# Altium PCB PCB1.PcbDoc
Units mm, origin at the board's own origin, x right, y up, seen from the top; angles counter-clockwise.
Board outline 134.5 x 50 mm, 2 copper layers (Top Layer, Bottom Layer), stack 0.98 mm thick; 15 components, 13 nets, 40 pads, 7 vias.
Unrouted connection lines stored in the file: 1.
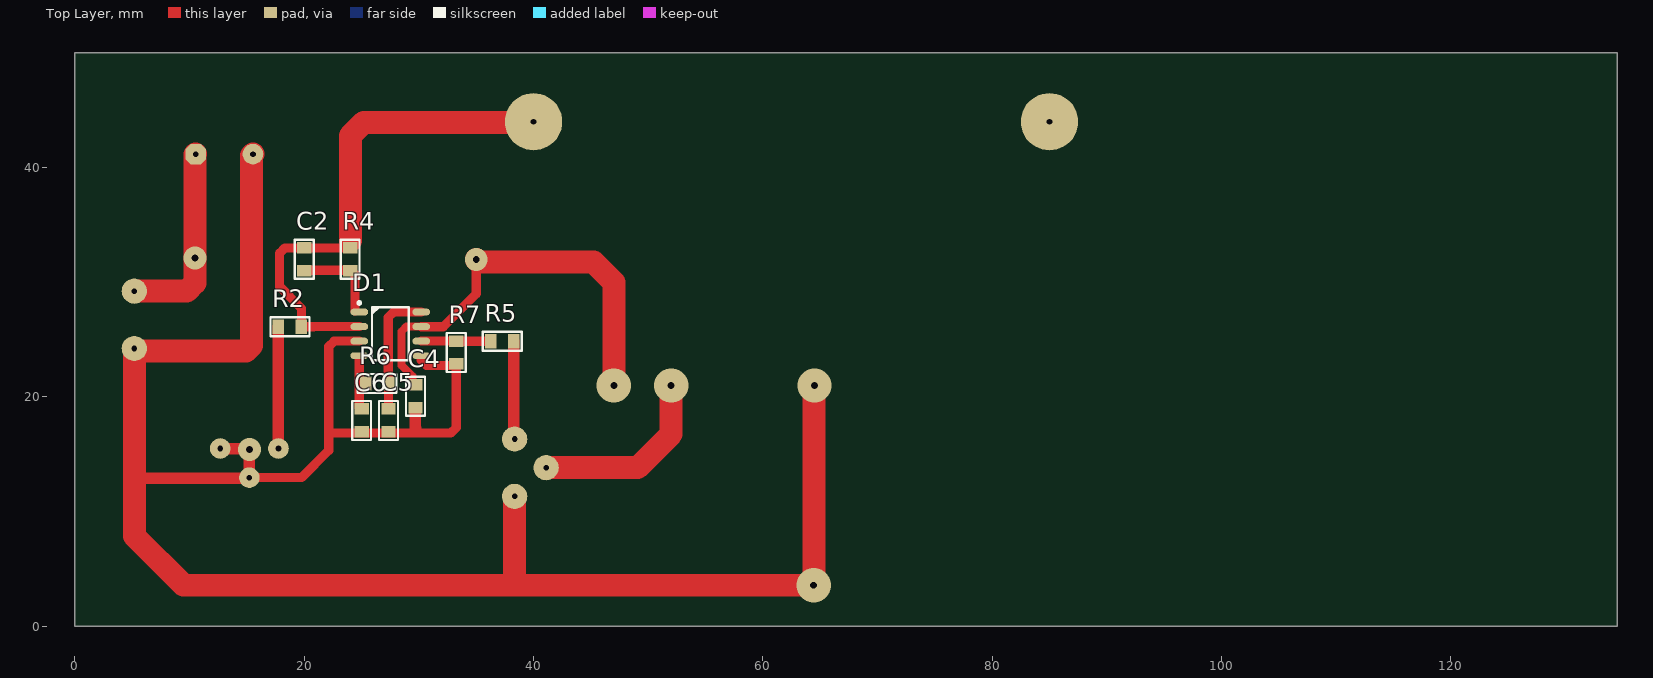
[diagram p0: Top Layer view]
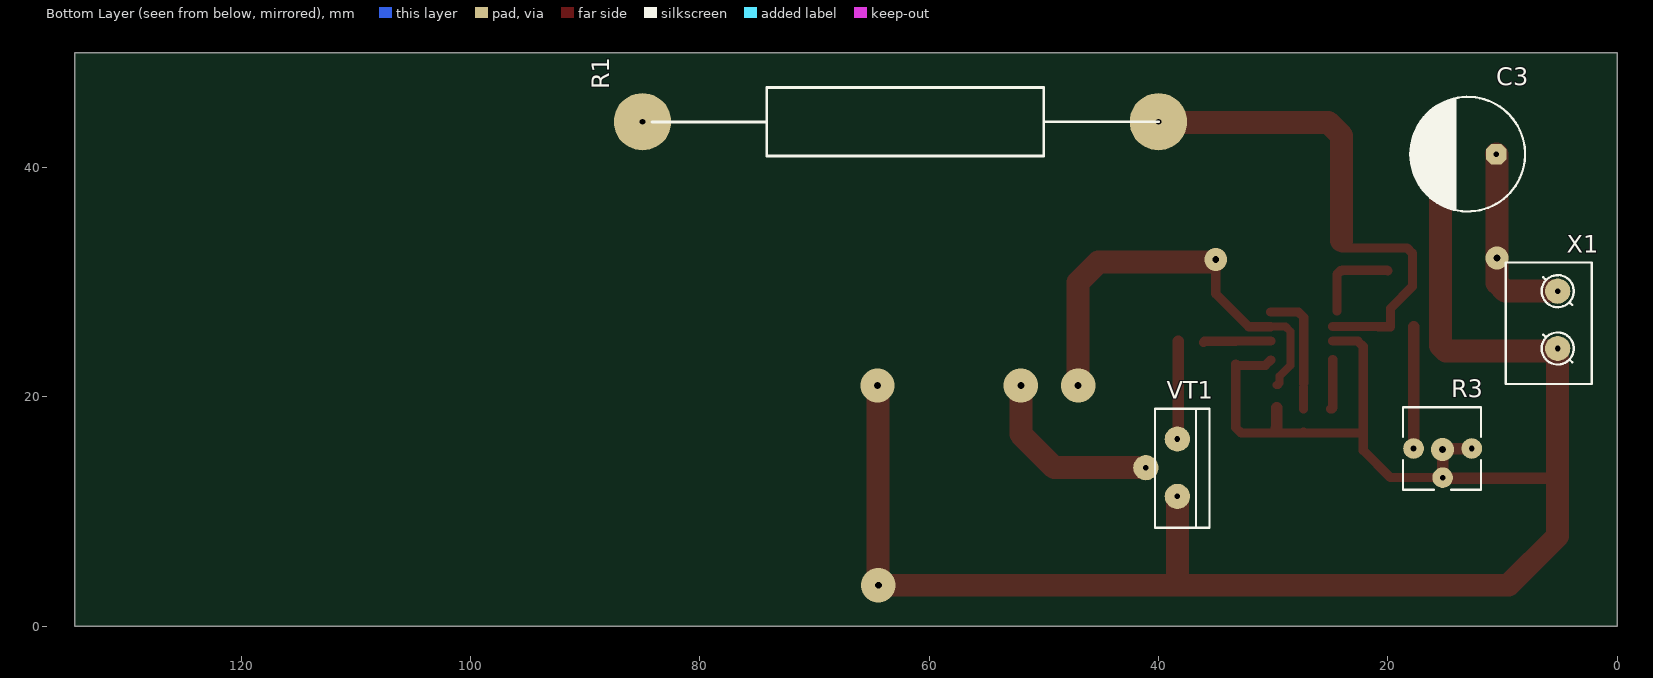
[diagram p1: Bottom Layer view, seen from below]
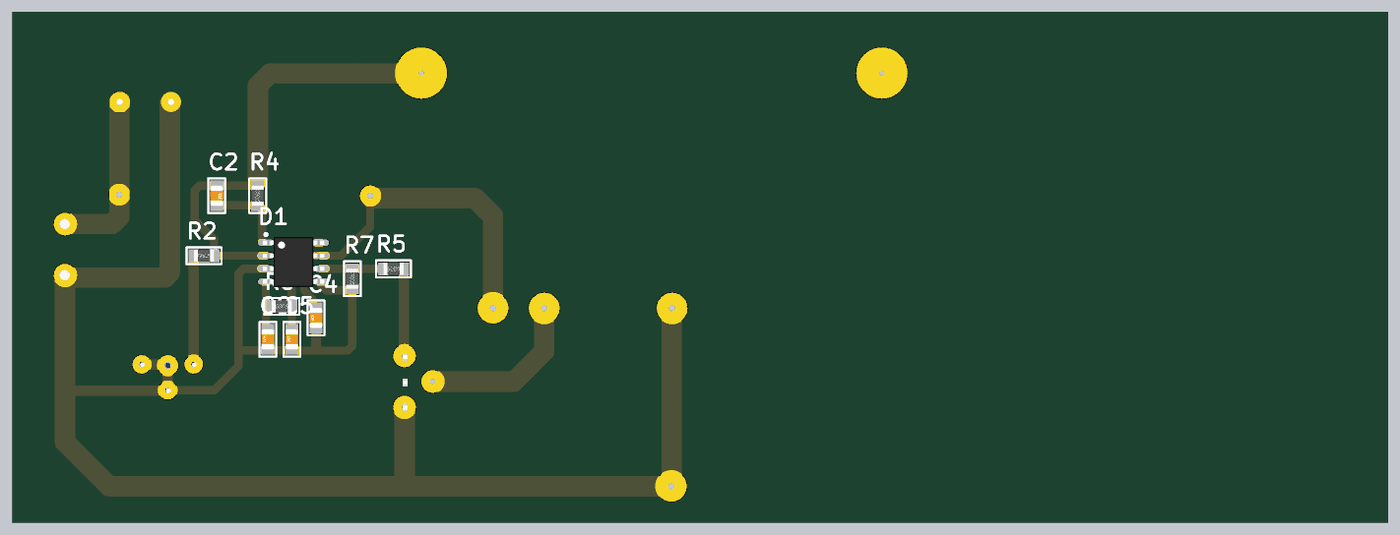
[diagram p2: 3D render of the assembled board from above, using the file's embedded part models]
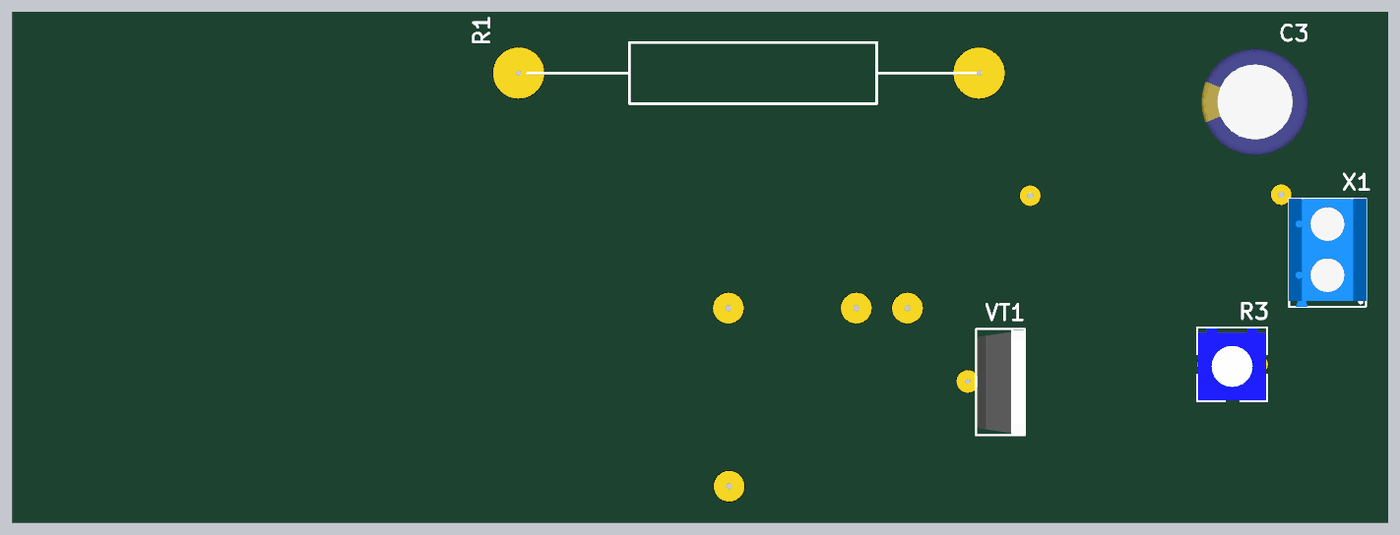
[diagram p3: 3D render of the assembled board from below, using the file's embedded part models]

## Layer stack, top to bottom
Top Solder: solder mask 0.0102, Solder Resist, Dk 3.5
Top Layer: signal copper 0.0356
Dielectric 1: dielectric 0.909, FR-4, Dk 4.8
Bottom Layer: signal copper 0.0356
Bottom Solder: solder mask 0.0102, Solder Resist, Dk 3.5

## Board outline
0,0 0,50 134.5,50 134.5,0

## Design rules (kind name [scope] priority, off if disabled: settings)
BoardOutlineClearance [All] p1: gap=0.3 ignorepadtopadclearanceinfootprint=FALSE
Clearance Clearance_MultiLayerPad [OnLayer('Multi-Layer') and IsPad] p1: gap=0.3 ignorepadtopadclearanceinfootprint=FALSE except(0: Arc-Hole Track-Hole SMDPad-Hole THPad-Hole Via-Hole Fill-Hole Poly-Hole Region-Hole Text-Hole)
Clearance Clearance_Polygon [InPolygon] p2: gap=0.2 ignorepadtopadclearanceinfootprint=FALSE except(0: Arc-Hole Track-Hole SMDPad-Hole THPad-Hole Via-Hole Fill-Hole Poly-Hole Region-Hole Text-Hole; 0.3: Arc-Poly Arc-Region Track-Poly Track-Region SMDPad-Poly SMDPad-Region THPad-Poly THPad-Region Via-Poly Via-Region Fill-Poly Fill-Region Poly-Poly Poly-Region Region-Region)
Clearance [All] p3: gap=0.2 ignorepadtopadclearanceinfootprint=FALSE except(0: Arc-Hole Track-Hole SMDPad-Hole THPad-Hole Via-Hole Fill-Hole Poly-Hole Region-Hole Text-Hole)
ComponentClearance [All] p1: gap=0.5 collisioncheckmode=3 verticalgap=0.5 showdistances=FALSE
DiffPairsRouting [All] p1: maxlimit=0.4 minlimit=0.2 mostfreqgap=0.2 toplayer_minwidth=0.2 toplayer_maxwidth=0.3 toplayer_prefwidth=0.2 bottomlayer_minwidth=0.2 bottomlayer_maxwidth=0.3 bottomlayer_prefwidth=0.2 maxuncoupledlength=12.7
Height [All] p1: minheight=0 maxheight=50 prefheight=12.7
HoleSize [All] p1: absolutevalues=TRUE maxlimit=10 minlimit=0.2 maxpercent=80.000 minpercent=20.000
HoleToHoleClearance [All] p1: gap=0.3 allowstackedmicrovias=TRUE
MinimumSolderMaskSliver [All] p1: minsoldermaskwidth=0.2
PlaneClearance [All] p1: clearance=0.5
PlaneConnect [All] p1: planeconnectstyle=Relief reliefexpansion=0.5 reliefentries=4 reliefconductorwidth=0.5 reliefairgap=0.3
PolygonConnect PolygonConnect_PadGND [InNet('GND') and IsPad] p1: connectstyle=Relief reliefconductorwidth=0.5 reliefentries=4 polygonreliefangle="90 Angle" airgapwidth=0.3
PolygonConnect PolygonConnect_Via [IsVia] p2: connectstyle=Direct reliefconductorwidth=0.254 reliefentries=4 polygonreliefangle="90 Angle" airgapwidth=0.254
PolygonConnect [All] p3: connectstyle=Relief reliefconductorwidth=0.5 reliefentries=4 polygonreliefangle="90 Angle" airgapwidth=0.3
RoutingTopology [All] p1: topology=Vertical
RoutingVias [All] p1: holewidth=0.2 width=0.4 viastyle="Through Hole" minholewidth=0.2 minwidth=0.4 maxholewidth=0.5 maxwidth=1.2
SilkToSolderMaskClearance [IsPad] p1: minsilkscreentomaskgap=0.2 clearancetoexposedcopper=TRUE
SolderMaskExpansion [All] p1: expansion=0.075 istentingtop=FALSE
Width [All] p1: maxlimit=10 minlimit=0.2 preferedwidth=0.2
20 further rules are at their usual default settings.

## Components (designator, comment, footprint, x,y, rotation, side; value= is the part's Value field where it differs from the comment)
C2 "Ceramic capacitor, 100n?, X7R, ±10%, 16V, 0805, -55...+125°C" "CAP: 0805" 20,32 r270 top value=100n?
C3 "Aluminium capacitor, 470μF, 25V, ±20%, 54mOhm, 14x10x5 mm, -55...+105°C" "CAP: D10C5H12.5" 13.025,41.175 r0 bottom value=470μF
C4 "Ceramic capacitor, 0.1uF, X7R, ±10%, 16V, 0805, -55...+125°C" "CAP: 0805" 29.7,20.05 r90 top value=0.1uF
C5 "Ceramic capacitor, 1uF, X7R, ±10%, 16V, 0805, -55...+125°C" "CAP: 0805" 27.35,17.95 r90 top value=1uF
C6 "Ceramic capacitor, 2200pF, X7R, ±10%, 16V, 0805, -55...+125°C" "CAP: 0805" 25,17.95 r90 top value=2200pF
D1 "PWM controller, supply 10...30V, 500kHz, External switch, -40...+105°C, 8-SOIC" 8-SOIC 27.5,25.5 r0 top
R1 "КЭВ-1 200 МОм" "КЭВ-1 case" 62,44 r0 bottom
R2 "Resistor film, 36k, ±5%, 0805, 0.125W, -55...+125°C" "RES: 0805" 18.75,26.125 r0 top value=36k
R3 "Resistor film, 10k, ±10%, 3296W, 0.5W, -55...+125°C" "RES: 3362P" 12.67,15.5 r0 bottom value=10k
R4 "Resistor film, 20k, ±5%, 0805, 0.125W, -55...+125°C" "RES: 0805" 24,32 r270 top value=20k
R5 "Resistor film, 9R1, ±5%, 0805, 0.125W, -55...+125°C" "RES: 0805" 37.275,24.85 r180 top value=9R1
R6 "Resistor film, 20k, ±5%, 0805, 0.125W, -55...+125°C" "RES: 0805" 26.35,21.175 r0 top value=20k
R7 "Resistor film, 470R, ±5%, 0805, 0.125W, -55...+125°C" "RES: 0805" 33.25,23.875 r270 top value=470R
VT1 "MOSFET N-channel transistor, 80V, 7A, 9.1nC, 2.5W, 34mOhm, 756pF, 8-TDSON, -55...+150°C" "TO-220 HV" 38.35,13.825 r270 bottom
X1 "Terminal connector, 2pin, 3.5mm, 300VAC, 10A" "CON: KF301-5.0-2P" 6,26.5 r90 bottom

## Footprints (in the part's own frame and the unit in brackets; to place one, negate y for a bottom-side part, rotate by r counter-clockwise, add the part's x,y. Pads: shape width x height; smd on the part's side, far side on the other; paste and mask are expansions set on the pad)
8-SOIC [mm] "pitch 1.27 mm"
  rrect100% 1.55x0.6 smd: 1(-2.7,1.905) 2(-2.7,0.635) 3(-2.7,-0.635) 4(-2.7,-1.905) 5(2.7,-1.905) 6(2.7,-0.635) 7(2.7,0.635) 8(2.7,1.905)
  round 0.7 on Mech1: 28(-2.395,1.8)
  silkscreen extent -2.82,-2.3 1.61,2.82, body extent -3,-2.45 3,2.45, height 1.75
"CAP: 0805" [mm]
  rect 1x1.25 smd: 1(-1,0) 2(1,0)
  silkscreen extent -1.7,-0.82 1.7,0.82, body extent -1,-0.62 1,0.63, height 0.78
"CAP: D10C5H12.5" [mm]
  oct 1.8x1.8 hole 0.5: 1(-2.5,0)
  round 1.8 hole 0.5: 2(2.5,0)
  silkscreen extent -5,-5 5,5, body extent -5.25,-5.25 5.25,5.25, height 14.05
"CON: KF301-5.0-2P" [mm]
  round 2.2 hole 0.5: 1(2.725,-0.825) 2(-2.275,-0.825)
  round 0.5 on Bottom Overlay: ""(-4.875,-3.3)
  silkscreen extent -5.38,-3.8 5.23,3.7, body extent -5.37,-3.85 5.23,3.75, height 10
"RES: 0805" [mm]
  rect 1x1.25 smd: 1(-1,0) 2(1,0)
  silkscreen extent -1.7,-0.82 1.7,0.82, body extent -1,-0.6 1,0.6, height 0.44
"RES: 3362P" [mm]
  round 1.8 hole 0.5: 1(0,0) 2(2.54,2.54) 3(5.08,0)
  silkscreen extent -0.8,-3.6 6,3.6, body extent -0.7,-3.49 5.9,3.5, height 4.5
"TO-220 HV" [mm]
  round 2.2 hole 0.5: 1(-2.5,0) 2(0,-2.75) 3(2.5,0)
  silkscreen extent -5.15,-1.95 5.25,2.8, body extent -5,-1.8 5.2,2.7, height 22.06
"КЭВ-1 case" [mm]
  round 5 hole 0.5: 1(-22,0)
  round 5 hole 0.5 mask+0.075: 2(23,0)
  silkscreen extent -22,-3 22.16,3.01

## Part data
C2 C4 C5 C6: library part Ceramic_0805, Manufacturer=Yageo, Package=0805, PartNumber=CC0805KRX7R7BB104, Temperature=-55...+125°C, Tolerance=±10%, TypeCapacitor="Ceramic capacitor", TypeDielectric=X7R, Voltage=16V, HelpURL=https://www.digikey.com/product-detail/en/yageo/CC0805KRX7R7BB104/311-1142-1-ND/303052
  C2: ValueManufacturerPartNumber="Ceramic capacitor, 100n?, X7R, ±10%, 16V, 0805, -55...+125°C"
  C4: ValueManufacturerPartNumber="Ceramic capacitor, 0.1uF, X7R, ±10%, 16V, 0805, -55...+125°C"
  C5: ValueManufacturerPartNumber="Ceramic capacitor, 1uF, X7R, ±10%, 16V, 0805, -55...+125°C"
  C6: ValueManufacturerPartNumber="Ceramic capacitor, 2200pF, X7R, ±10%, 16V, 0805, -55...+125°C"
C3: library part Aluminium, Manufacturer=Wurth, Package="14x10x5 mm", PartNumber=860080475013, Temperature=-55...+105°C, Tolerance=±20%, TypeCapacitor="Aluminium capacitor", Voltage=25V, HelpURL=https://www.digikey.com/product-detail/en/wurth-electronics-inc/860080475013/732-9029-1-ND/5728972, Impedance=54mOhm, ValueManufacturerPartNumber="Aluminium capacitor, 470μF, 25V, ±20%, 54mOhm, 14x10x5 mm, -55...+105°C"
D1: library part UC3842BVD1R2G, "PWM controller", Frequency=500kHz, Manufacturer="ON Semiconductor", Package=8-SOIC, PartNumber=KA3845, Temperature=-40...+105°C, VoltageInput="supply 10...30V", ComponentType="PWM controller", HelpURL=https://www.digikey.com/product-detail/en/on-semiconductor/UC3842BVD1R2G/UC3842BVD1R2GOSCT-ND/5802572, OutputType="External switch", ValueManufacturerPartNumber="PWM controller, supply 10...30V, 500kHz, External switch, -40...+105°C, 8-SOIC"
R1: library part "HV RESISTOR КЭВ-1"
R2 R4 R5 R6 R7: library part Resistor_0805, Manufacturer=Yageo, Package=0805, PartNumber=RC0805JR-07100RL, Power=0.125W, Temperature=-55...+125°C, Tolerance=±5%, TypeResistor="Resistor film", HelpURL=https://www.digikey.com/product-detail/en/yageo/RC0805JR-07100RL/311-100ARCT-ND/731185
  R2: ValueManufacturerPartNumber="Resistor film, 36k, ±5%, 0805, 0.125W, -55...+125°C"
  R4 R6: ValueManufacturerPartNumber="Resistor film, 20k, ±5%, 0805, 0.125W, -55...+125°C"
  R5: ValueManufacturerPartNumber="Resistor film, 9R1, ±5%, 0805, 0.125W, -55...+125°C"
  R7: ValueManufacturerPartNumber="Resistor film, 470R, ±5%, 0805, 0.125W, -55...+125°C"
R3: library part Trimmer, Manufacturer=Bourns, Package=3296W, PartNumber=3296W-1-103LF, Power=0.5W, Temperature=-55...+125°C, Tolerance=±10%, TypeResistor="Resistor film", HelpURL=https://www.digikey.com/product-detail/en/bourns-inc/3296W-1-103LF/3296W-103LF-ND/1088045, ValueManufacturerPartNumber="Resistor film, 10k, ±10%, 3296W, 0.5W, -55...+125°C"
VT1: library part MOSFET_N_123, CurrentDS=7A, InputCapacitor=756pF, Manufacturer="Infineon Technologies", MaxPower=2.5W, Package=8-TDSON, PartNumber=BSC340N08NS3GATMA1, Temperature=-55...+150°C, VoltageDS=80V, GateCharge=9.1nC, HelpURL=https://www.digikey.com/product-detail/en/infineon-technologies/BSC340N08NS3GATMA1/BSC340N08NS3GATMA1TR-ND/2080655, RDS=34mOhm, TypeTransistor="MOSFET N-channel transistor", ValueManufacturerPartNumber="MOSFET N-channel transistor, 80V, 7A, 9.1nC, 2.5W, 34mOhm, 756pF, 8-TDSON, -55...+150°C"
X1: library part Connector_terminal_2pin, CurrentMax=10A, Manufacturer=Degson, PartNumber=DG350-3.5-02P-14, VoltageMax=300VAC, CommentText="\"Разъем\"", HelpURL=https://www.chipdip.ru/product/dg350-3.5-02p-12, Multichannel=2pin, Pitch=3.5mm, TypeConnector="Terminal connector", ValueManufacturerPartNumber="Terminal connector, 2pin, 3.5mm, 300VAC, 10A"

## Via types
v1: diameter 3, hole 0.6, Top Layer to Bottom Layer, 4 vias
v2: diameter 2, hole 0.6, Top Layer to Bottom Layer, 3 vias

## Nets (pads, with @x,y where several pads share a name; then routed paths per layer and width w, separated by ;. In a path a pad name is that pad's centre, name@x,y a point inside that pad or via, vN(x,y) a via of type N, cw(c..) or ccw(c..) an arc to the next point about the centre after c; other vN are vias at no path point)
GND: C3.2 C4.1 C5.1 C6.1 D1.3 D1.5 R3.1 R3.2 R7.2 VT1.3 X1.2 | length 186.7
  Top Layer w0.8: X1.2 X1.2@5.4,24 ; R3.2 19.76,12.96 22.137,15.338 22.137,16.863 ; D1.3 22.606,24.865 22.137,24.396 22.137,16.863 ; C5.1 27.45,16.85 29.7,16.85 32.781,16.85 33.25,17.319 R7.2 ; C5.1@27.386,16.863 25,16.863 22.137,16.863 ; 30.2,23.219 30.669,22.75 R7.2@33,22.75
  Top Layer w1: 5.175,13.225 5.475,12.925 15.175,12.925 R3.2 15.205,12.965 15.205,15.42 15.162,15.462 12.708,15.462 R3.1 ; C4.1 29.7,17.275 29.725,17.25
  Top Layer w2: X1.2 5.175,13.225 5.175,7.875 9.475,3.575 38.5,3.575 ; X1.2@5.4,24 14.931,24 15.4,24.469 15.4,41.05 C3.2 ; VT1.3 38.35,3.725 38.5,3.575 ; v1(64.5,21) 64.463,20.963 64.463,3.612 v1(64.425,3.575) 38.5,3.575
  other v2: 15.225,15.4
NetC1_1: R1.2
NetC2_1: C2.1 D1.2 R1.1 R2.2 R4.1 | length 44.2
  Top Layer w0.8: R4.1 19.775,33 18.319,33 17.85,32.531 17.85,29.625 19.75,27.725 R2.2 20.825,26.125 20.835,26.135 D1.2
  Top Layer w2: 24.025,33.625 24.016,33.634 24.016,42.778 25.187,43.95 39.95,43.95 R1.1
NetC2_2: C2.2 D1.1 R4.2 | length 7.8
  Top Layer w0.8: C2.2 20.05,31.05 23.95,31.05 R4.2 24.125,31 24.425,30.7 D1.1@24.425,27.505
NetC5_2: C5.2 D1.8 R6.2 | length 10.7
  Top Layer w0.8: C5.2 R6.2@27.35,20.85 ; R6.2 27.325,21.2 27.325,26.936 27.794,27.405 D1.8
NetC6_2: C6.2 D1.4 R6.1 | length 4.5
  Top Layer w0.8: 24.8,23.25 24.8,19.05 24.775,19.05 24.875,18.95 C6.2
NetD1_6: D1.6 R5.2 R7.1 | length 5.7
  Top Layer w0.8: D1.6 R7.1@33.01,24.865 ; R7.1@33.25,24.85 35.975,24.85 R5.2@36.075,24.75
NetR2_1: R2.1 R3.3 | length 10.6
  Top Layer w1: R3.3 R2.1
NetR5_1: R5.1 VT1.1 | length 8.6
  Top Layer w1: R5.1 38.275,24.432 38.275,16.4 VT1.1
NetR8_2: 
NetTR1_2: VT1.2 | length 16.4
  Top Layer w2: VT1.2 49.075,13.825 52,16.75 v1(52,21)
NetTR1_4: 
VCC: C3.1 C4.2 D1.7 X1.1 | length 54.9
  Top Layer w0.7: C4.2 29.575,21.05 29.425,21.2 29.425,21.825 28.5,22.75 28.5,25.725 28.91,26.135 D1.7
  Top Layer w0.8: D1.7 30.21,26.125 32.125,26.125 35,29 v2(35,32)
  Top Layer w2: X1.1 9.75,29.225 10.475,29.95 v2(10.475,32.1) 10.475,41.125 C3.1 ; v2(35,32) 35.25,31.75 45.25,31.75 47,30 v1(47,21)
  Bottom Layer w1: v2@34.9,32.1 v2(35,32)
pads on no net: D1.28 X1.

## Silkscreen, mask and mechanical layers (free items; w line width, h text height)
Border:
  the board outline again, w0.5

## Dimensions
0,50 to 134.5,50 on Size
0,0 to 0,50 on Size